# EAGLE board shifter_test (EAGLE 6.1)
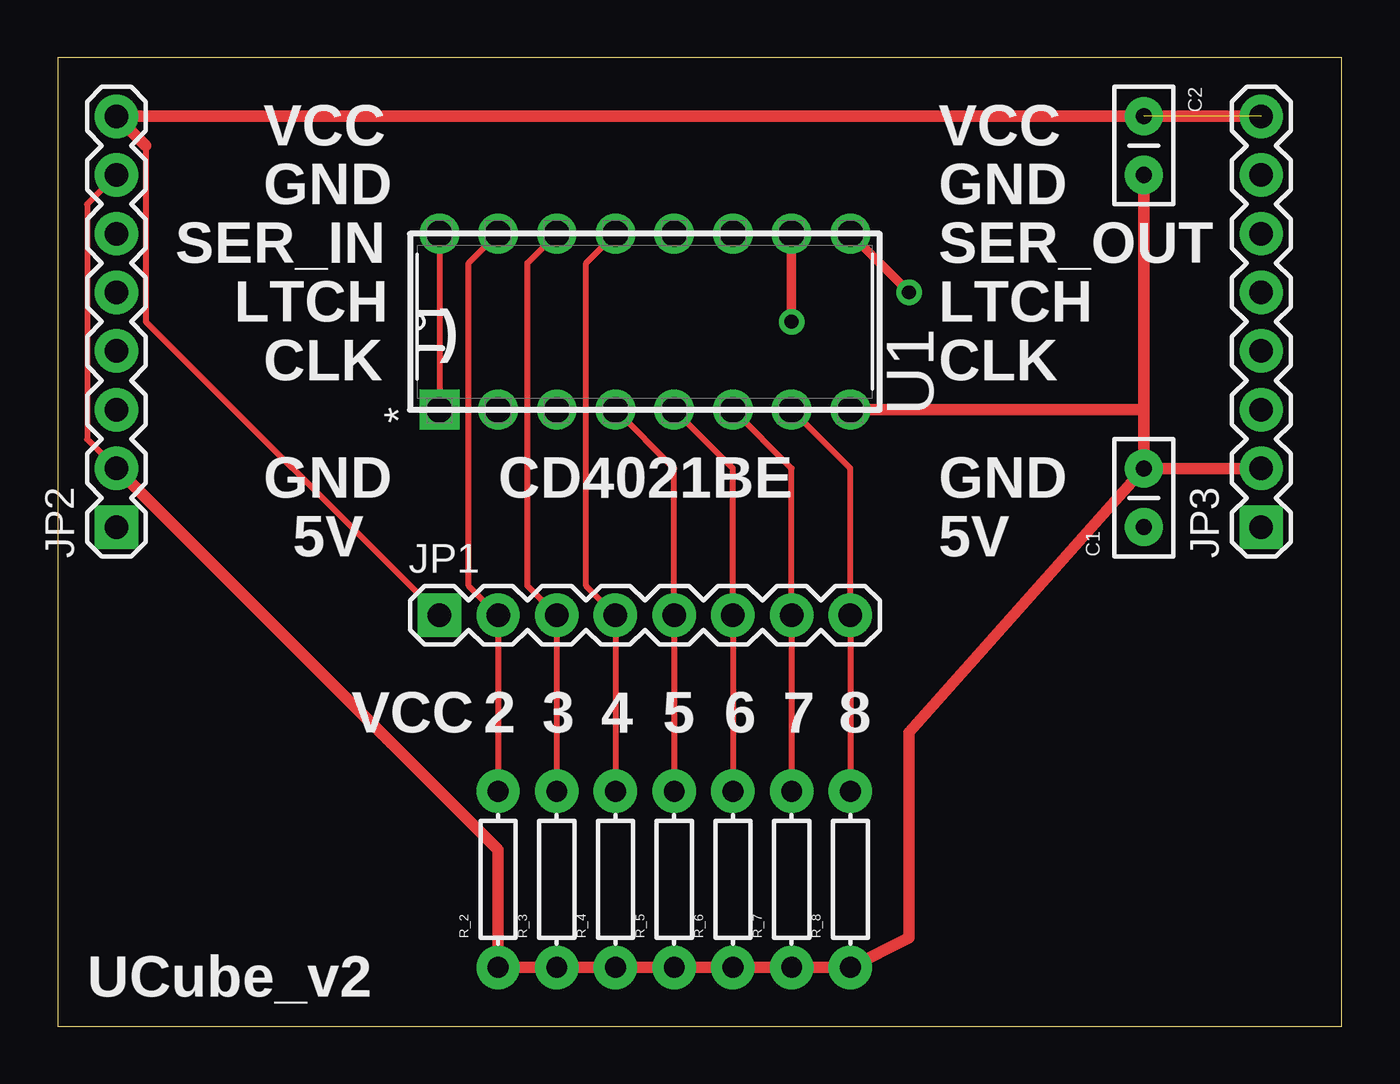
[diagram p0: board, top side]
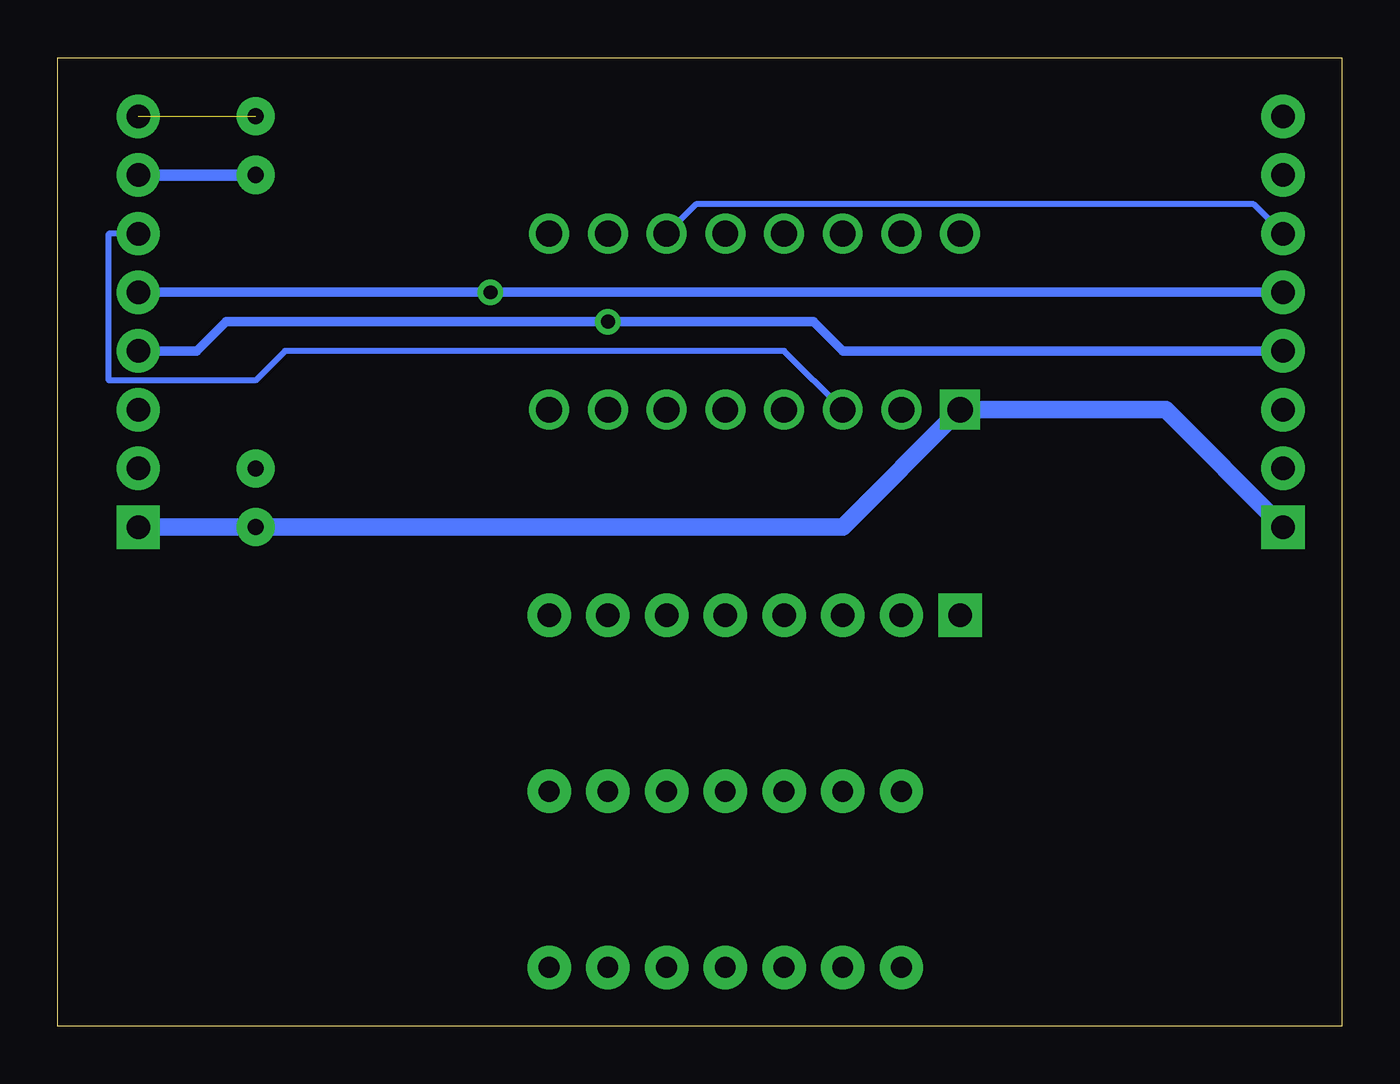
[diagram p1: board, bottom side, seen from below]

Size 55.55 x 41.9 mm. Coordinates in mm from the lower left corner, seen from the top.
Outline: 0,0 55.55,0 55.55,41.9 0,41.9 0,0
Copper layers (1*16): Top 0.035mm / dielectric 1.5mm / Bottom 0.035mm
Design rules: minimum track width 8mil, minimum drill 20mil, track to track 8mil, track to pad 8mil, pad to pad 8mil, via to via 8mil, smd to smd 8mil, copper to edge 10mil, drill to drill 8mil, minimum pad ring 12mil, minimum via ring 10mil, stop-mask expansion 4mil, vias tented up to drill 25mil, thermal gap 10mil

## Footprints (pad centres in the part's own frame; a part is rotated, then mirrored left to right if it is on the bottom)
CAP-PTH-SMALL2 = drill 0.7 pad 1.651: 1 0,0; 2 2.54,0
1X08 = drill 1.016 pad 1.88 square: 1 0,0 | drill 1.016 pad 1.88: 2 2.54,0; 3 5.08,0; 4 7.62,0; 5 10.16,0; 6 12.7,0; 7 15.24,0; 8 17.78,0
AXIAL-0.3 = drill 0.9 pad 1.88: P$1 -3.81,0; P$2 3.81,0
DIP254P762X508-16 = drill 1.118 square: 1 -7.62,17.78 | drill 1.118: 2 -7.62,15.24; 3 -7.62,12.7; 4 -7.62,10.16; 5 -7.62,7.62; 6 -7.62,5.08; 7 -7.62,2.54; 8 -7.62,0; 9 0,0; 10 0,2.54; 11 0,5.08; 12 0,7.62; 13 0,10.16; 14 0,12.7; 15 0,15.24; 16 0,17.78

## Placement (x,y rotation side)
C1  0.1µf  [CAP-PTH-SMALL2]  46.99,21.59 90 top
C2  0.1µf  [CAP-PTH-SMALL2]  46.99,39.37 270 top
JP1  JP1_LED_HEADER  [1X08]  16.51,17.78 0 top
JP2  JP2_SER_IN  [1X08]  2.54,21.59 90 top
JP3  JP3_SER_OUT  [1X08]  52.07,21.59 90 top
R_2  [AXIAL-0.3]  19.05,6.35 90 top
R_3  [AXIAL-0.3]  21.59,6.35 90 top
R_4  [AXIAL-0.3]  24.13,6.35 90 top
R_5  [AXIAL-0.3]  26.67,6.35 90 top
R_6  [AXIAL-0.3]  29.21,6.35 90 top
R_7  [AXIAL-0.3]  31.75,6.35 90 top
R_8  [AXIAL-0.3]  34.29,6.35 90 top
U1  CD4021BE  [DIP254P762X508-16]  34.29,34.29 90 top

## Library data of the parts
C1 C2 JP1-JP3 R_2-R_8 = SparkFun
U1 = cd4021be; DESCRIPTION: CMOS 8-STAGE SHIFT REGISTERS; MPN: CD4021BE; OC_FARNELL: -; OC_NEWARK: 60K5104; PACKAGE: PDIP-16; SUPPLIER: Texas Instruments

## Nets
5V: C1.1 JP2.1 JP3.1 U1.1 U1.16
CLOCK: JP2.4 JP3.4 U1.10
GND: C1.2 C2.2 JP2.2 JP2.7 JP3.2 JP3.7 R_2.P$1 R_3.P$1 R_4.P$1 R_5.P$1 R_6.P$1 R_7.P$1 R_8.P$1 U1.8
LATCH: JP2.5 JP3.5 U1.9
P2: JP1.2 R_2.P$2 U1.15
P3: JP1.3 R_3.P$2 U1.14
P4: JP1.4 R_4.P$2 U1.13
P5: JP1.5 R_5.P$2 U1.4
P6: JP1.6 R_6.P$2 U1.5
P7: JP1.7 R_7.P$2 U1.6
P8: JP1.8 R_8.P$2 U1.7
SERIAL_IN: JP2.6 U1.11
SERIAL_OUT: JP3.6 U1.3
VCC: C2.1 JP1.1 JP2.8 JP3.8

## Tracks (layer width: path | path; a pad name or v marks a point on that pad's centre or on a via)
5V
  Top 0.254: U1.16 U1.1
  Bottom 0.762: JP2.1 7.62,26.67 U1.1 21.59,21.59 C1.1 JP3.1
CLOCK  (via drill 0.6)
  Top 0.406: U1.10 v31.75,30.48
  Bottom 0.406: JP2.4 21.59,29.21 22.86,30.48 v31.75,30.48 48.26,30.48 49.53,29.21 JP3.4
GND
  Top 0.254: JP2.2 1.27,25.4 1.27,35.56 JP2.7
  Top 0.508: JP3.2 C1.2 | C1.2 46.99,26.67 | 46.99,26.67 C2.2 | JP2.2 19.05,7.62 R_2.P$1 R_3.P$1 R_4.P$1 R_5.P$1 R_6.P$1 R_7.P$1 R_8.P$1 36.83,3.81 36.83,12.7 C1.2 | 46.99,26.67 U1.8
  Bottom 0.508: JP3.7 C2.2
LATCH  (via drill 0.6)
  Top 0.406: U1.9 v36.83,31.75
  Bottom 0.406: JP2.5 v36.83,31.75 JP3.5
P2
  Top 0.254: U1.15 17.78,33.02 17.78,19.05 JP1.2 R_2.P$2
P3
  Top 0.254: U1.14 20.32,33.02 20.32,19.05 JP1.3 R_3.P$2
P4
  Top 0.254: U1.13 22.86,33.02 22.86,19.05 JP1.4 R_4.P$2
P5
  Top 0.254: U1.4 26.67,24.13 JP1.5 R_5.P$2
P6
  Top 0.254: U1.5 29.21,24.13 JP1.6 R_6.P$2
P7
  Top 0.254: U1.6 31.75,24.13 JP1.7 R_7.P$2
P8
  Top 0.254: U1.7 34.29,24.13 JP1.8 R_8.P$2
SERIAL_IN
  Bottom 0.254: U1.11 27.94,35.56 3.81,35.56 JP2.6
SERIAL_OUT
  Bottom 0.254: U1.3 24.13,29.21 45.72,29.21 46.99,27.94 53.34,27.94 53.34,34.29 JP3.6
VCC  (1 unrouted)
  Top 0.254: JP1.1 3.81,30.48 3.81,38.1
  Top 0.508: 3.81,38.1 JP2.8 JP3.8

## Text on the board
tPlace: VCC | VCC | GND | GND | SER_IN | SER_OUT | LTCH | LTCH | ) | CLK | CLK | GND | CD4021BE | GND | 5V | 5V | VCC | 2 | 3 | 4 | 5 | 6 | 7 | 8 | UCube_v2